# Altium PCB Light_Circuit.PcbDoc
Units mil, origin at the board's own origin, x right, y up, seen from the top; angles counter-clockwise.
Board outline 6000 x 4000 mil, 2 copper layers (Top Layer, Bottom Layer); 8 components, 6 nets, 23 pads, 4 vias.
Unrouted connection lines stored in the file: 10.
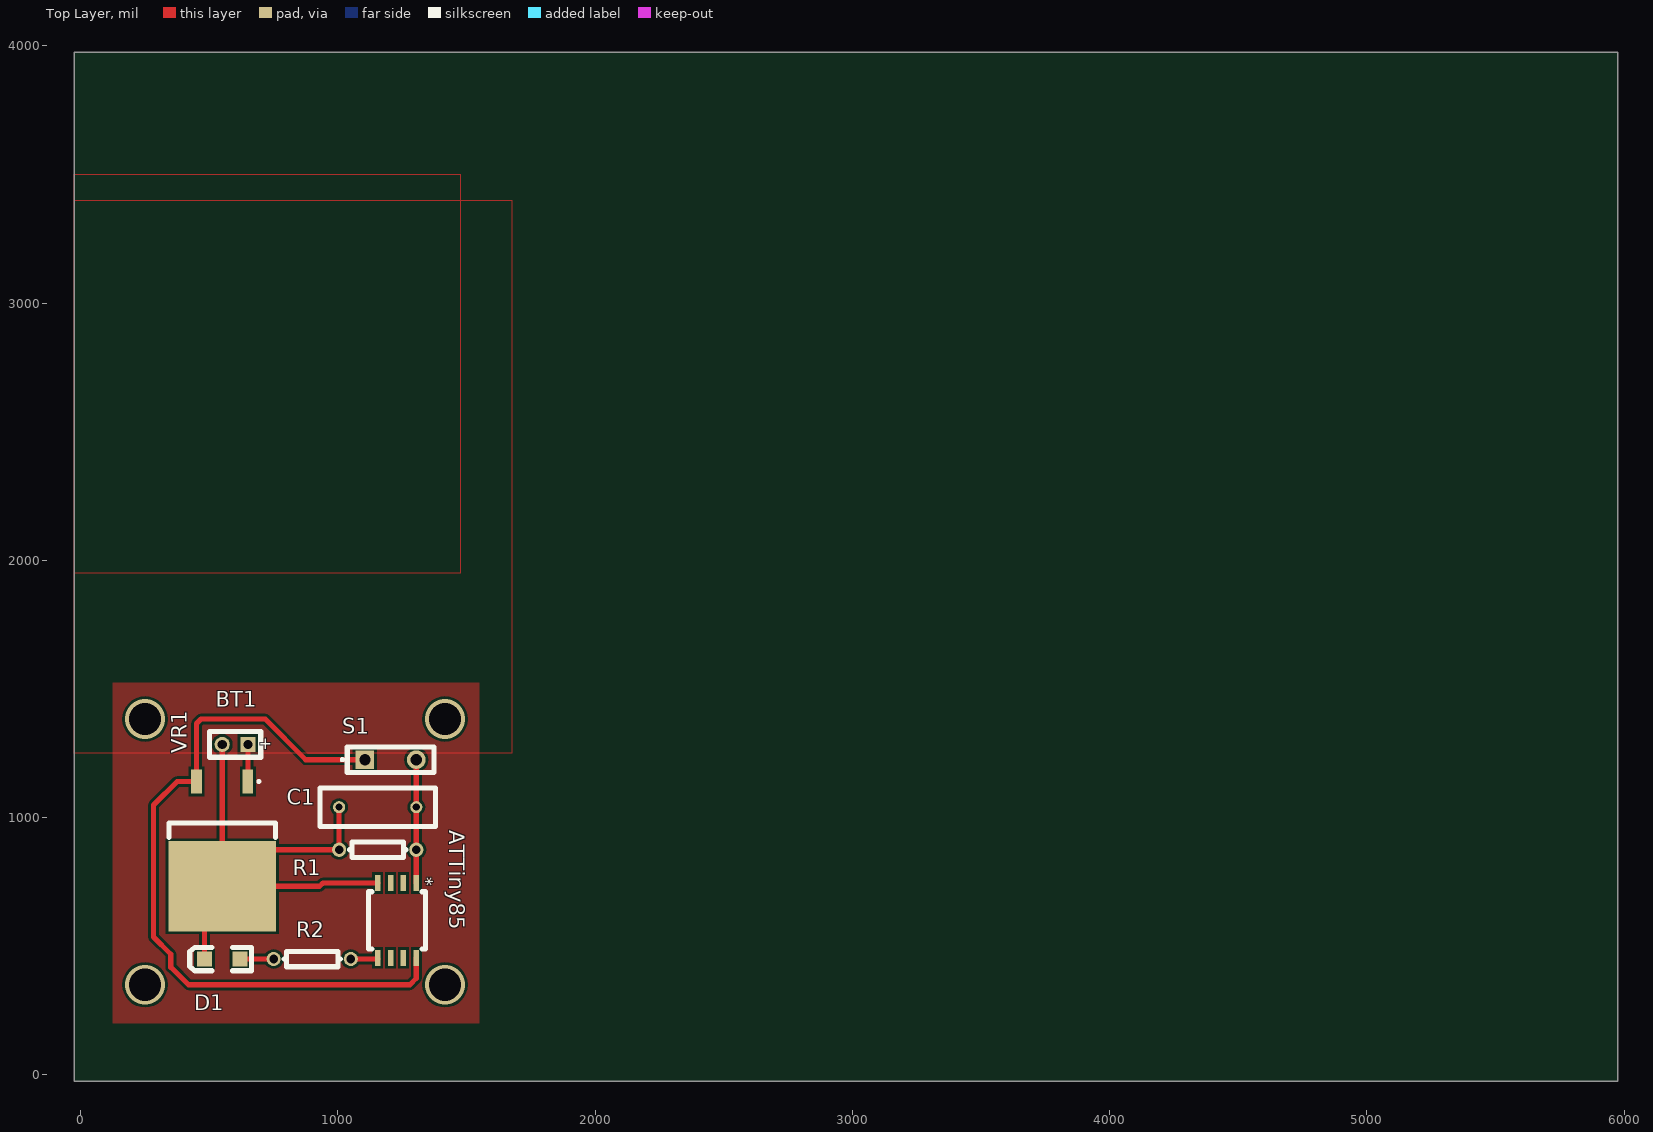
[diagram p0: Top Layer view]
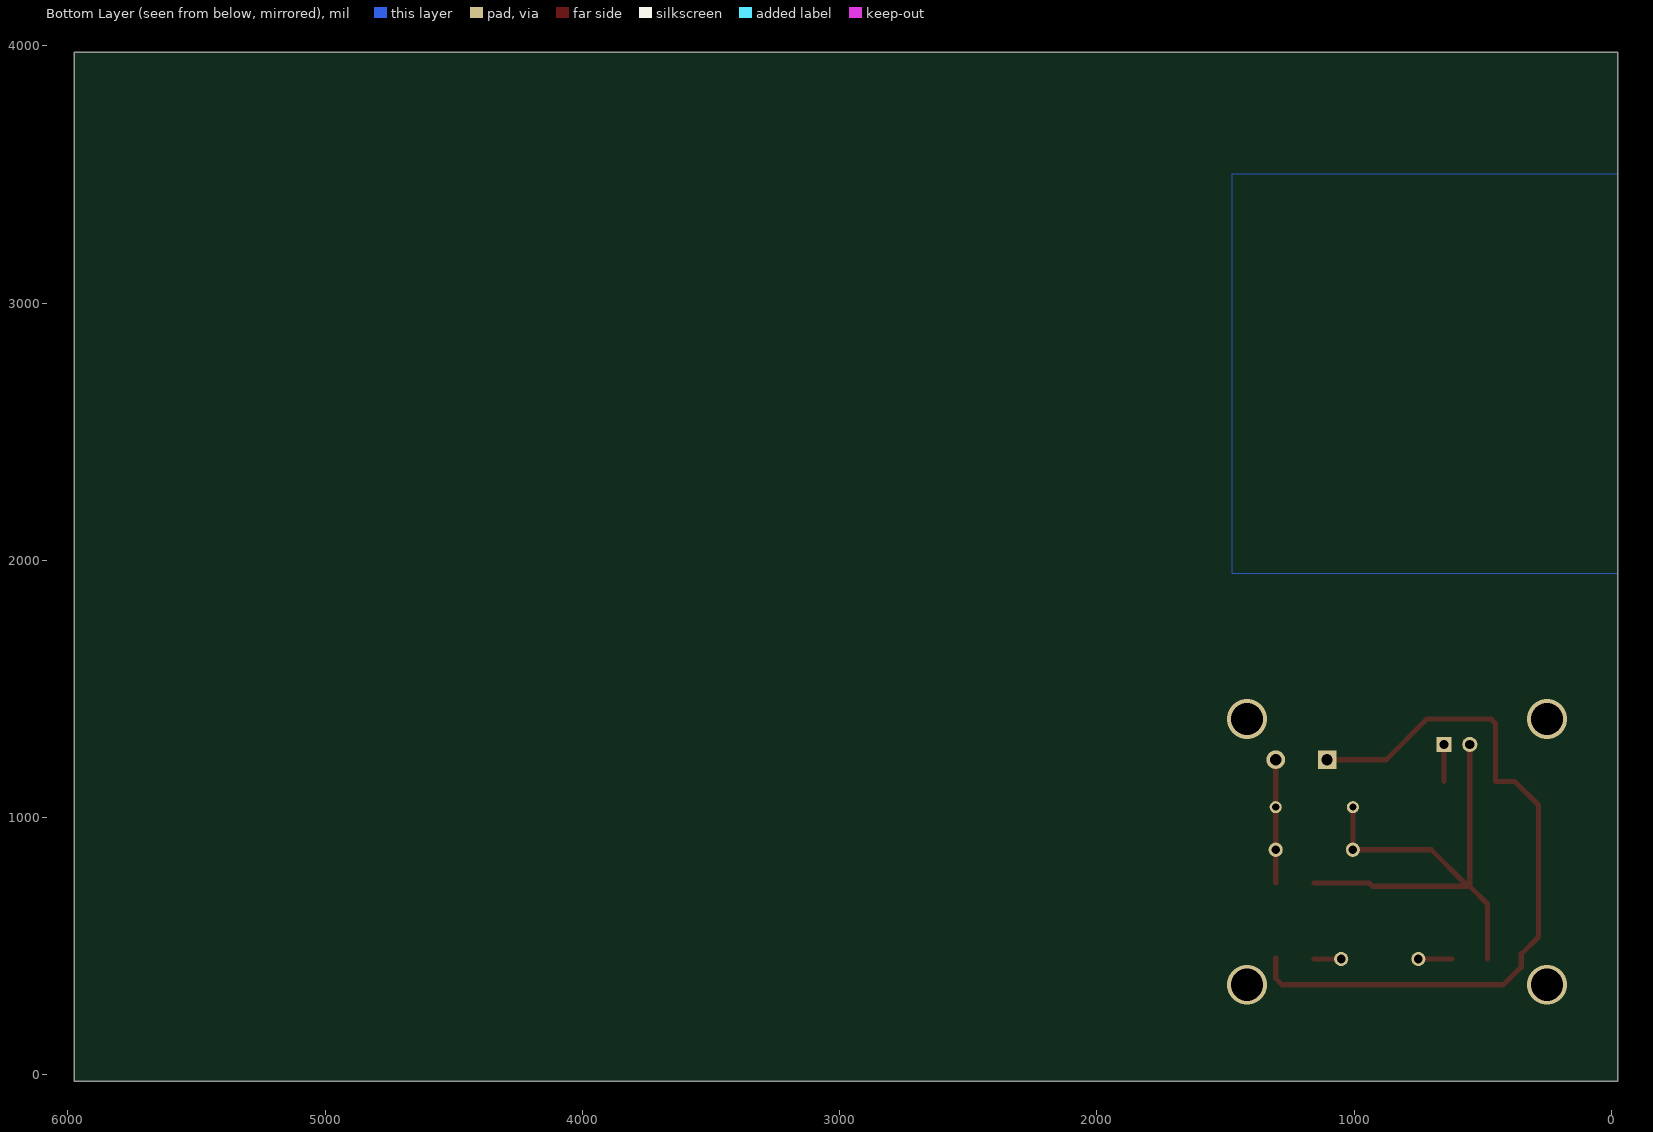
[diagram p1: Bottom Layer view, seen from below]

## Layer stack, top to bottom
Top Solder: solder mask 0.4, Solder Resist, Dk 3.5
Top Layer: signal copper 1.4
Dielectric 1: dielectric 12.6, FR-4, Dk 4.8
Bottom Layer: signal copper 1.4
Bottom Solder: solder mask 0.4, Solder Resist, Dk 3.5

## Board outline
-25,-25 5975,-25 5975,3975 -25,3975

## Design rules (kind name [scope] priority, off if disabled: settings)
Clearance [All] p1: gap=10 ignorepadtopadclearanceinfootprint=FALSE
PolygonConnect [All] p1: connectstyle=Relief reliefconductorwidth=10 reliefentries=4 polygonreliefangle="90 Angle" airgapwidth=10
RoutingVias [All] p1: holewidth=28 width=50 viastyle="Through Hole" minholewidth=28 minwidth=50 maxholewidth=28 maxwidth=50
ShortCircuit [All] p1: allowed=TRUE
SolderMaskExpansion [All] p1: expansion=4
UnRoutedNet [All] p1: checkbadconnections=TRUE
Width [All] p1: maxlimit=20 minlimit=10 preferedwidth=10 minimp=50.000000 maximp=50.000000 favimp=50.000000
28 further rules are at their usual default settings.

## Components (designator, comment, footprint, x,y, rotation, side; value= is the part's Value field where it differs from the comment)
ATTiny85 "ATTiny85" 8S2 1229.5,600 r270 top
BT1 "Battery" BAT-2 600,1284.45 r180 top
C1 "Cap" RAD-0.3 1154.5,1040.53 r180 top value=100nF
D1 "LED2" 3.2X1.6X1.1 550,450 r180 top
R1 "Res1" AXIAL-0.3 1154.5,875 r0 top value=1K
R2 "Res1" AXIAL-0.3 900,450 r0 top value=1K
S1 "SW-PB" SPST-2 1204.5,1225 r0 top
VR1 "Volt Reg" D2PAK_N 550,872.58 r270 top

## Footprints (in the part's own frame and the unit in brackets; to place one, negate y for a bottom-side part, rotate by r counter-clockwise, add the part's x,y. Pads: shape width x height; smd on the part's side, far side on the other; paste and mask are expansions set on the pad)
3.2X1.6X1.1 [mm] "SMT LED; 2 Flat Leads"
  rect 1.5x1.5 smd: 1(-1.75,0) 2(1.75,0)
  silkscreen extent -2.9,-1.15 3.2,1.15
8S2 [mil]
  rect 62x21 smd paste+0 mask+0: 1(-145.5,75) 2(-145.5,25) 3(-145.5,-25) 4(-145.5,-75) 5(145.5,-75) 6(145.5,-25) 7(145.5,25) 8(145.5,75)
  silkscreen extent -112,-111 112,111, body extent -157,-105 167,106, height 85
AXIAL-0.3 [mm] "Axial Device, Thru-Hole; 2 Leads; 0.3 in Pin Spacing"
  round 1.4 hole 0.85: 1(-3.81,0) 2(3.81,0)
  silkscreen extent -2.77,-0.76 2.77,0.76
BAT-2 [mm] "Battery; 2 Leads"
  rect 1.5x1.5 hole 0.9: 1(-1.27,0)
  round 1.5 hole 0.9: 2(1.27,0)
  silkscreen extent -2.54,-1.27 2.54,1.27
D2PAK_N [mm] "D2-PAK, 4-Leads, Body 8.8x10.4mm, Pitch 2.54mm, Lead Span 15.1mm, IPC Medium Density"
  rect 2.4x1.05 smd: 1(-6.8,2.54) 3(-6.8,-2.54)
  rect 8.9x10.65 smd: 2(3.55,0)
  silkscreen extent -6.92,-5.25 -1.3,5.25, body extent -2.7,-5.28 6.3,5.28, height 4.69
RAD-0.3 [mm] "Radial Cap, Thru-Hole; 2 Leads; 0.3 in Pin Spacing"
  round 1.2 hole 0.7: 1(-3.81,0) 2(3.81,0)
  silkscreen extent -5.71,-1.91 5.71,1.91
SPST-2 [mm] "Switch; 2 Leads"
  rect 1.85x1.85 hole 1.1: 1(-2.54,0)
  round 1.85 hole 1.1: 2(2.54,0)
  silkscreen extent -4.89,-1.27 4.28,1.27

## Part data
ATTiny85: library part ATTiny85_1
BT1: "Multicell Battery", LatestRevisionDate=17-Jul-2002, LatestRevisionNote="Re-released for DXP Platform.", PackageDescription="Battery; 2 Leads", PackageReference=BAT-2, Published=24-Mar-1999, Publisher="Altium Limited"
C1: "Capacitor", LatestRevisionDate=17-Jul-2002, LatestRevisionNote="Re-released for DXP Platform.", PackageDescription="Radial Cap, Thru-Hole; 2 Leads; 0.3 in Pin Spacing", PackageReference=RAD-0.3, Published=8-Jun-2000, Publisher="Altium Limited"
D1: "Typical RED, GREEN, YELLOW, AMBER GaAs LED", LatestRevisionDate=17-Jul-2002, LatestRevisionNote="Re-released for DXP Platform.", PackageDescription="SM LED; 2 Flat Leads", PackageReference=3.2X1.6X1.1, PackageVersion=Feb-2002, Published=8-Jun-2000, Publisher="Altium Limited"
R1 R2: "Resistor", LatestRevisionDate=17-Jul-2002, LatestRevisionNote="Re-released for DXP Platform.", PackageDescription="Axial Device, Thru-Hole; 2 Leads; 0.3 in Pin Spacing", PackageReference=AXIAL-0.3, Published=8-Jun-2000, Publisher="Altium Limited"
S1: "Switch", LatestRevisionDate=17-Jul-2002, LatestRevisionNote="Re-released for DXP Platform.", PackageDescription="Switch; 2 Leads", PackageReference=SPST-2, Published=24-Mar-1999, Publisher="Altium Limited"
VR1: "Voltage Regulator", LatestRevisionDate=29-May-2009, LatestRevisionNote="IPC-7351 Footprint Added.", PackageDescription="3-Pin Transistor Outline Package 2.54 mm Pitch, 15.1 mm Lead Span", PackageReference=D2PAK, Published=24-Mar-1999, Publisher="Altium Limited"

## Via types
v1: diameter 155, hole 125, Top Layer to Bottom Layer, 4 vias

## Nets (pads, with @x,y where several pads share a name; then routed paths per layer and width w, separated by ;. In a path a pad name is that pad's centre, name@x,y a point inside that pad or via, vN(x,y) a via of type N, cw(c..) or ccw(c..) an arc to the next point about the centre after c; other vN are vias at no path point)
GND: ATTiny85.4 BT1.2 C1.2 D1.2 R1.1 VR1.2
NetATTiny85_1: ATTiny85.1 C1.1 R1.2 S1.2
NetATTiny85_5: ATTiny85.5 R2.2 | length 104.5
  Top Layer w20: R2.2 ATTiny85.5@1154.5,450
NetATTiny85_8: ATTiny85.8 S1.1 VR1.3
NetBT1_1: BT1.1 VR1.1 | length 144.2
  Top Layer w20: VR1.1 BT1.1
NetD1_1: D1.1 R2.1 | length 131.4
  Top Layer w20: D1.1@618.59,450 D1.1 R2.1
pads on no net: ATTiny85.2 ATTiny85.3 ATTiny85.6 ATTiny85.7
copper on no net: | length 5598.9
  Top Layer w20: 481.1,450 481.1,663.92 550,732.81 ; 550,1284.45 550,732.81 ; 1004.5,1040.53 1004.5,875 700,875 561.34,736.34 553.53,736.34 550,732.81 ; 1104.5,1225 875,1225 717.2,1382.8 700,1382.8 467.2,1382.8 450,1365.61 450,1364.29 450,1140.29 375,1140.29 283.45,1048.74 283.45,550 283.45,535.49 350,468.94 350,417.19 352.14,417.19 419.33,350 1263.95,350 1279.5,350 1304.5,375 1304.5,454.5 ; 1154.5,745.5 941.55,745.5 928.87,732.81 550,732.81 ; 1304.5,745.5 1304.5,875 ; 1304.5,870.5 1304.5,1100 ; 1304.5,1040.53 1304.5,1225 ; 550,732.81 557.81,732.81 550,732.81
  other v1: 250,350 1416,350 250,1382.8 1416,1382.8

## Polygon pours and split planes (outlines as drawn)
no net on Top Layer (solid, pour order 16): 125,1525 1550,1525 1550,200 125,200
no net on Top Layer "Top Layer-No Net 2" (solid, shelved, pour order 10): -25,3500 1475,3500 1475,1950 -25,1950
no net on Top Layer "Top Layer-No Net" (solid, shelved, pour order 8): -25,3400 1675,3400 1675,1250 -25,1250
no net on Bottom Layer "Bottom Layer-No Net" (solid, shelved, pour order 12): -25,3500 1475,3500 1475,1950 -25,1950

## Text inside footprints (layer, text, board x,y; h text height)
ATTiny85: Top Overlay "*" at 1320.5,768 h50 r270; Mechanical 13 "*" at 1282,704 h50 r270
BT1: Top Overlay "+" at 744.49,1307.17 h45.28 r180